# EAGLE board Arduino_Shield (EAGLE 6.5.0)
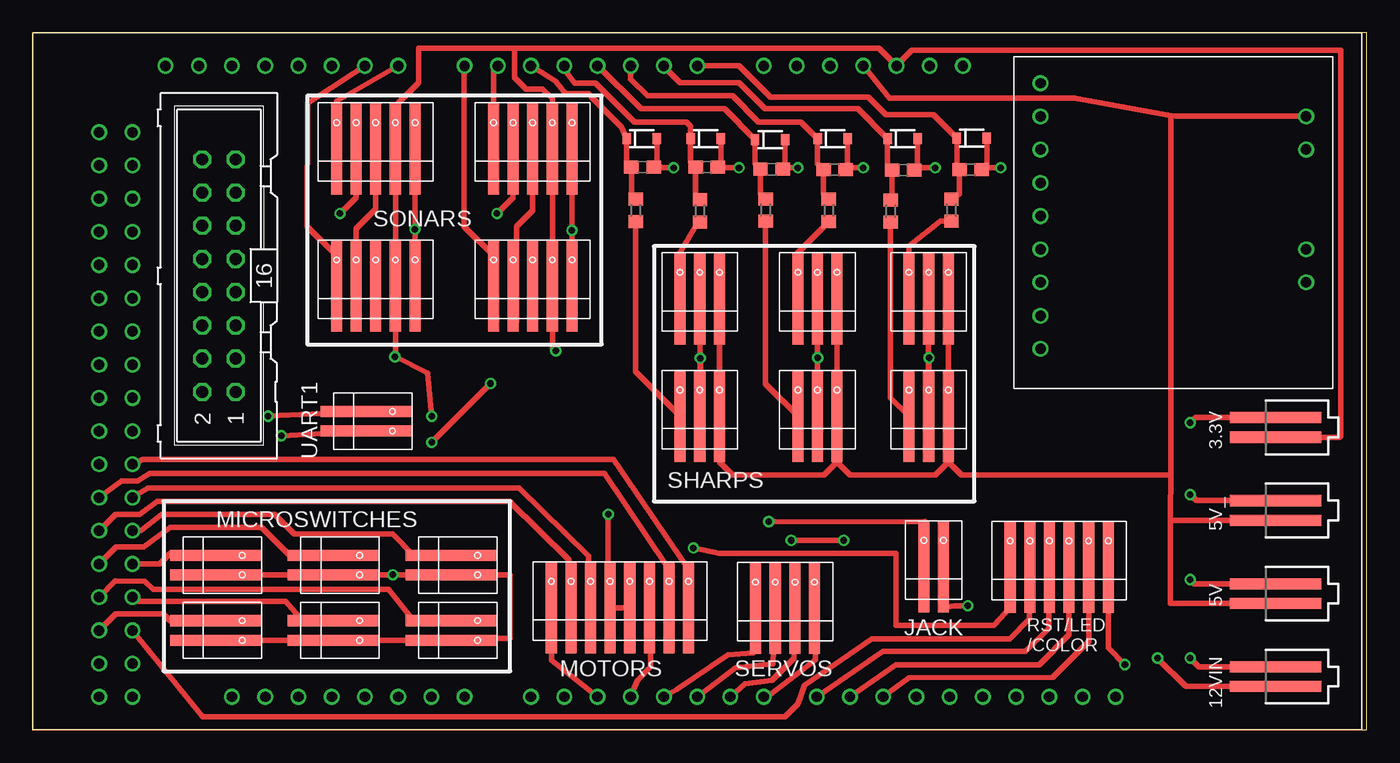
[diagram p0: board, top side]
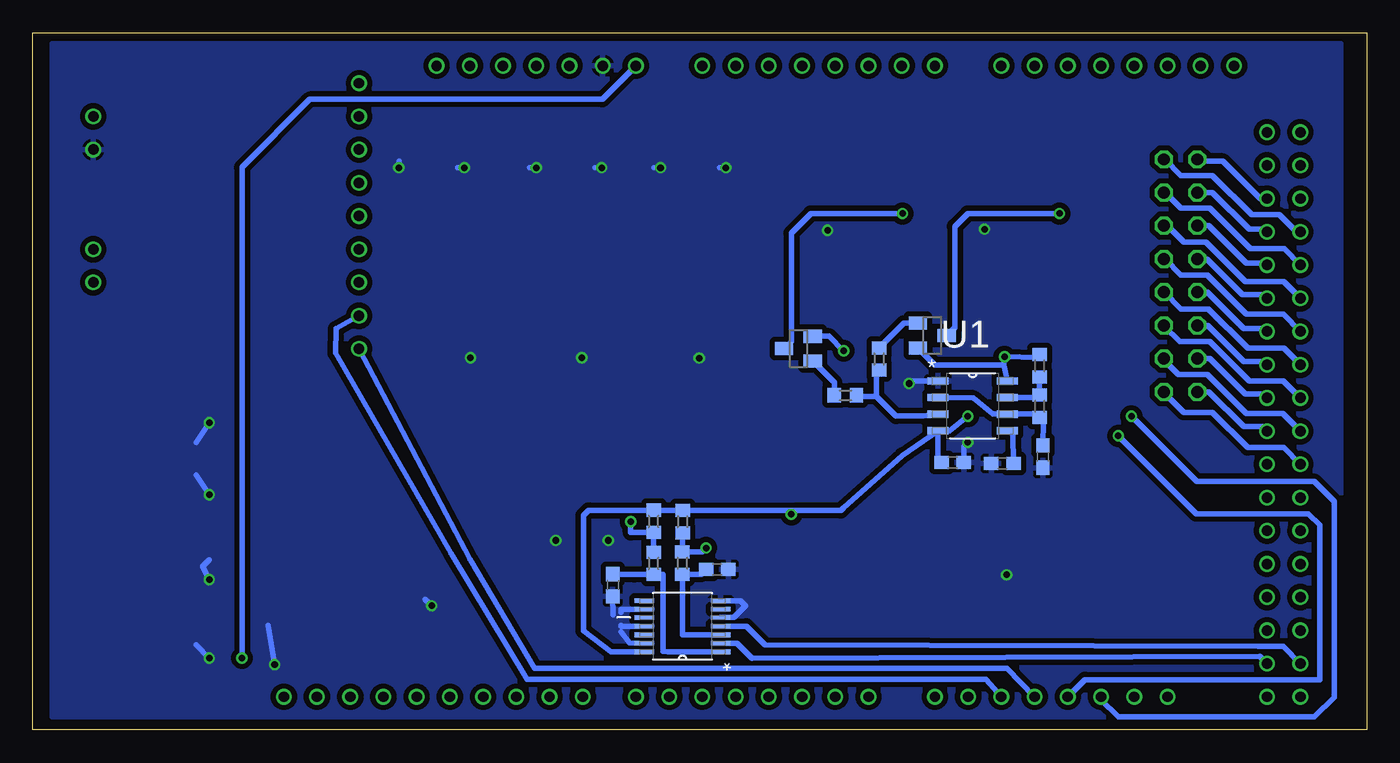
[diagram p1: board, bottom side, seen from below]

Size 102 x 53.33 mm. Coordinates in mm from the lower left corner, seen from the top.
Outline: 0,0 102,0 102,53.33 0,53.33 0,0
Copper layers (1*16): Top 0.0356mm / dielectric 1.5011mm / Bottom 0.0356mm
Design rules "LaenPCBOrder": minimum track width 6mil, minimum drill 13mil, track to track 6mil, track to pad 6mil, pad to pad 6mil, via to via 6mil, smd to smd 6mil, copper to edge 15mil, drill to drill 6mil, minimum pad ring 7mil, minimum via ring 7mil, stop-mask expansion 4mil, vias tented up to drill 0mil, thermal gap 10mil

## Footprints (pad centres in the part's own frame; a part is rotated, then mirrored left to right if it is on the bottom)
87438-02 = smd 7 x 0.85: 1 0,0.75; 2 0,-0.75
C0603 = smd 1.1 x 1: 1 -0.85,0; 2 0.85,0
ML16 = drill 0.914 octagon: 1 -8.89,-1.27; 2 -8.89,1.27; 3 -6.35,-1.27; 4 -6.35,1.27; 5 -3.81,-1.27; 6 -3.81,1.27; 7 -1.27,-1.27; 8 -1.27,1.27; 9 1.27,-1.27; 10 1.27,1.27; 11 3.81,-1.27; 12 3.81,1.27; 13 6.35,-1.27; 14 6.35,1.27; 15 8.89,-1.27; 16 8.89,1.27
87437-0243 = smd 7 x 0.85: P$1 0,0.865; P$2 0,-0.635
87437-0843 = smd 7 x 0.85: P$1 -0.04,5.27; P$2 -0.04,3.77; P$3 -0.04,2.27; P$4 -0.04,0.77; P$5 -0.04,-0.73; P$6 -0.04,-2.23; P$7 -0.04,-3.73; P$8 -0.04,-5.23
SOT23 = smd 1 x 1.4: 1 -0.95,-1.1; 2 0.95,-1.1; 3 0,1.1
R0603 = smd 1 x 1.1: 1 -0.85,0; 2 0.85,0
87437-0643 = smd 7 x 0.85: P$1 -0.04,3.77; P$2 -0.04,2.27; P$3 -0.04,0.77; P$4 -0.04,-0.73; P$5 -0.04,-2.23; P$6 -0.04,-3.73
87437-0443 = smd 7 x 0.85: P$1 0.05,2.25; P$2 0.05,0.75; P$3 0.05,-0.75; P$4 0.05,-2.25
87437-0343 = smd 7 x 0.85: P$1 0,1.5; P$2 0,0; P$3 0,-1.5
87437-0543 = smd 7 x 0.85: P$1 -0.04,2.77; P$2 -0.04,1.27; P$3 -0.04,-0.23; P$4 -0.04,-1.73; P$5 -0.04,-3.23
SOIC127P600X175-8N = smd 1.6 x 0.559: 1 -2.642,1.905; 2 -2.642,0.635; 3 -2.642,-0.635; 4 -2.642,-1.905; 5 2.642,-1.905; 6 2.642,-0.635; 7 2.642,0.635; 8 2.642,1.905
SOP65P640X120-14N = smd 1.473 x 0.356: 1 -2.921,1.956; 2 -2.921,1.295; 3 -2.921,0.66; 4 -2.921,0; 5 -2.921,-0.66; 6 -2.921,-1.295; 7 -2.921,-1.956; 8 2.921,-1.956; 9 2.921,-1.295; 10 2.921,-0.66; 11 2.921,0; 12 2.921,0.66; 13 2.921,1.295; 14 2.921,1.956
ARDUINO-DUE = drill 0.8: 3.3V -17.78,-25.4; 5V 40.64,22.86; 5V2 43.18,22.86; 5V3 -15.24,-25.4; 22 40.64,20.32; 23 43.18,20.32; 24 40.64,17.78; 25 43.18,17.78; 26 40.64,15.24; 27 43.18,15.24; 28 40.64,12.7; 29 43.18,12.7; 30 40.64,10.16; 31 43.18,10.16; 32 40.64,7.62; 33 43.18,7.62; 34 40.64,5.08; 35 43.18,5.08; 36 40.64,2.54; 37 43.18,2.54; 38 40.64,0; 39 43.18,0; 40 40.64,-2.54; 41 43.18,-2.54; 42 40.64,-5.08; 43 43.18,-5.08; 44 40.64,-7.62; 45 43.18,-7.62; 46 40.64,-10.16; 47 43.18,-10.16; 48 40.64,-12.7; 49 43.18,-12.7; 50 40.64,-15.24; 51 43.18,-15.24; 52 40.64,-17.78; 53 43.18,-17.78; A0 -2.54,-25.4; A1 0,-25.4; A2 2.54,-25.4; A3 5.08,-25.4; A4 7.62,-25.4; A5 10.16,-25.4; A6 12.7,-25.4; A7 15.24,-25.4; A8 20.32,-25.4; A9 22.86,-25.4; A10 25.4,-25.4; A11 27.94,-25.4; AREF -29.464,22.86; CANRX 35.56,-25.4; CANTX 38.1,-25.4; DAC0 30.48,-25.4; DAC1 33.02,-25.4; GND -26.924,22.86; GND2 40.64,-20.32; GND3 43.18,-20.32; GND4 -10.16,-25.4; GND5 -12.7,-25.4; IOREF -22.86,-25.4; PWM2 5.08,22.86; PWM3 2.54,22.86; PWM4 0,22.86; PWM5 -2.54,22.86; PWM6 -5.08,22.86; PWM7 -7.62,22.86; PWM8 -11.684,22.86; PWM9 -14.224,22.86; PWM10 -16.764,22.86; PWM11 -19.304,22.86; PWM12 -21.844,22.86; PWM13 -24.384,22.86; RESET -20.32,-25.4; RX0 10.16,22.86; RX1 27.94,22.86; RX2 22.86,22.86; RX3 17.78,22.86; SCL 33.02,22.86; SCL1 -34.544,22.86; SDA 30.48,22.86; SDA1 -32.004,22.86; TX0 7.62,22.86; TX1 25.4,22.86; TX2 20.32,22.86; TX3 15.24,22.86; VIN -7.62,-25.4
SOD-323 = smd 0.63 x 0.83: 1 -1.15,0; 2 1.15,0
UM6 = drill 0.8: P$1 9.652,9.652; P$2 9.652,7.112; P$3 9.652,4.572; P$4 9.652,2.032; P$5 9.652,-0.508; P$6 9.652,-3.048; P$7 9.652,-5.588; P$8 9.652,-8.128; P$9 9.652,-10.668; P$10 -10.668,-8.128; P$11 -10.668,-5.588; P$12 -10.668,2.032; P$13 -10.668,4.572

## Placement (x,y rotation side)
3.3V  87438-02  [87438-02]  95.02,23.14 180 top
5V  87438-02  [87438-02]  95.02,10.44 180 top
5V_  87438-02  [87438-02]  95.02,16.79 180 top
12VIN  87438-02  [87438-02]  95.02,4.09 180 top
C1  0.1uF  [C0603]  71.71,42.87 180 top
C2  0.1uF  [C0603]  27.86,20.4 180 bottom
C3  1uF  [C0603]  24.76,20.91 270 bottom
C4  0.1uF  [C0603]  66.55,42.82 180 top
C5  0.1uF  [C0603]  61.31,42.85 180 top
C6  0.1uF  [C0603]  56.49,42.89 180 top
C7  0.1uF  [C0603]  51.54,43.05 180 top
C8  0.1uF  [C0603]  31.66,20.45 0 bottom
C9  0.1uF  [C0603]  46.62,43.05 180 top
C10  10uF  [C0603]  57.65,11.07 270 bottom
C11  10uF  [C0603]  49.66,12.28 0 bottom
FPGA  [ML16]  14.24,34.75 90 top
JACK  87437-0243  [87437-0243]  69,12.5 90 top
MOTORS  87437-0843  [87437-0843]  44.92,9.4 90 top
Q1  BC857B  [SOT23]  43.46,29.16 90 bottom
Q2  BC857B  [SOT23]  33.22,30.17 270 bottom
R1  10K  [R0603]  46.1,39.74 90 top
R2  10K  [R0603]  51.02,39.7 90 top
R3  10K  [R0603]  56.04,39.76 90 top
R4  10K  [R0603]  60.87,39.74 90 top
R5  10K  [R0603]  65.59,39.69 90 top
R6  10K  [R0603]  70.24,39.77 90 top
R7  10K  [R0603]  54.53,15.96 90 bottom
R8  1K  [R0603]  54.53,12.74 90 bottom
R9  1K  [R0603]  52.33,12.76 90 bottom
R10  10K  [R0603]  52.31,15.94 90 bottom
R11  10K  [R0603]  39.87,25.59 0 bottom
R12  10K  [R0603]  37.29,28.37 270 bottom
RA  330K  [R0603]  25.02,27.86 90 bottom
RB  3.3K  [R0603]  25.01,24.76 90 bottom
RST/LED/COLOR  87437-0643  [87437-0643]  78.5,12.5 90 top
SERVOS  87437-0443  [87437-0443]  57.52,9.26 90 top
SHARP1  87437-0343  [87437-0343]  68.5,33 90 top
SHARP2  87437-0343  [87437-0343]  68.5,24 90 top
SHARP3  87437-0343  [87437-0343]  60,33 90 top
SHARP4  87437-0343  [87437-0343]  60,24 90 top
SHARP5  87437-0343  [87437-0343]  51,33 90 top
SHARP6  87437-0343  [87437-0343]  51,24 90 top
SONAR_BL  87437-0543  [87437-0543]  26,44.5 90 top
SONAR_BR  87437-0543  [87437-0543]  26,34 90 top
SONAR_FL  87437-0543  [87437-0543]  38,44.5 90 top
SONAR_FR  87437-0543  [87437-0543]  38,34 90 top
U1  TLC555  [SOIC127P600X175-8N]  30.14,24.79 0 bottom
U2  SN74HC14PW  [SOP65P640X120-14N]  52.32,7.94 180 bottom
U$1  ARDUINO-DUE  [ARDUINO-DUE]  48.26,25.4 180 top
U$2  ZENER_3.3V  [SOD-323]  71.79,45.28 0 top
U$3  ZENER_3.3V  [SOD-323]  66.51,45.22 0 top
U$4  ZENER_3.3V  [SOD-323]  61.16,45.22 0 top
U$5  ZENER_3.3V  [SOD-323]  56.38,45.15 0 top
U$6  ZENER_3.3V  [SOD-323]  51.46,45.22 0 top
U$7  ZENER_3.3V  [SOD-323]  46.57,45.22 0 top
UART1  87437-0243  [87437-0243]  25.5,23.5 0 top
UM6  UM6  [UM6]  86.7,38.8 180 top
USW1  87437-0243  [87437-0243]  14,7.5 0 top
USW2  87437-0243  [87437-0243]  23,7.5 0 top
USW3  87437-0243  [87437-0243]  32,7.5 0 top
USW4  87437-0243  [87437-0243]  14,12.5 0 top
USW5  87437-0243  [87437-0243]  23,12.5 0 top
USW6  87437-0243  [87437-0243]  32,12.5 0 top

## Library data of the parts
3.3V 5V 5V_ 12VIN = con-molex; OC_FARNELL: 1711327; OC_NEWARK: unknown
C1-C11 R1-R12 RA RB = rcl
FPGA = con-harting-ml; OC_FARNELL: unknown; OC_NEWARK: unknown
JACK MOTORS RST/LED/COLOR SERVOS SHARP1-SHARP6 SONAR_BL SONAR_BR SONAR_FL SONAR_FR U$1 UART1 UM6 USW1-USW6 = custom
Q1 Q2 = transistor-pnp
U1 = custom; MPN: LM555CM; OC_FARNELL: 9488227; OC_NEWARK: 78K6011; PACKAGE: SOIC-8; SUPPLIER: LM555CM
U2 = custom; MPN: SN74HC14PW; OC_FARNELL: 9591133; OC_NEWARK: 02H5414; PACKAGE: TSSOP-14; SUPPLIER: Texas Instruments
U$2-U$7 = SparkFun

## Nets
3.3VCC: 3.3V.1 C8.1 MOTORS.P$4 MOTORS.P$5 Q1.2 Q2.2 R7.2 R10.2 RA.2 SONAR_BL.P$4 SONAR_BR.P$4 SONAR_FL.P$4 SONAR_FR.P$4 U1.4 U1.8 U2.14 U$1.3.3V
5VCC: 5V.1 5V_.1 SHARP1.P$3 SHARP2.P$3 SHARP3.P$3 SHARP4.P$3 SHARP5.P$3 SHARP6.P$3 U$1.5V3 UM6.P$10
12VIN: 12VIN.1 U$1.VIN
COLOR: RST/LED/COLOR.P$2 U$1.24
GND: 3.3V.2 5V.2 5V_.2 12VIN.2 C1.1 C2.2 C3.2 C4.1 C5.1 C6.1 C7.1 C8.2 C9.1 C10.2 C11.2 JACK.P$2 RST/LED/COLOR.P$6 SHARP1.P$2 SHARP2.P$2 SHARP3.P$2 SHARP4.P$2 SHARP5.P$2 SHARP6.P$2 SONAR_BL.P$5 SONAR_BR.P$5 SONAR_FL.P$5 SONAR_FR.P$5 U1.1 U2.5 U2.7 U2.9 U2.11 U2.13 U$1.GND4 U$2.2 U$3.2 U$4.2 U$5.2 U$6.2 U$7.2 UM6.P$11 USW1.P$2 USW2.P$2 USW3.P$2 USW4.P$2 USW5.P$2 USW6.P$2
MOTOR1_BREAK: MOTORS.P$3 U$1.32
MOTOR1_DIR: MOTORS.P$2 U$1.31
MOTOR1_PWM: MOTORS.P$1 U$1.PWM2
MOTOR2_BREAK: MOTORS.P$8 U$1.34
MOTOR2_DIR: MOTORS.P$7 U$1.33
MOTOR2_PWM: MOTORS.P$6 U$1.PWM3
N$2: RST/LED/COLOR.P$3 U$1.PWM8
N$3: SERVOS.P$1 U$1.PWM4
N$4: SERVOS.P$2 U$1.PWM5
N$5: SERVOS.P$3 U$1.PWM6
N$6: SERVOS.P$4 U$1.PWM7
N$9: U$1.TX1 UART1.P$2
N$10: U$1.RX1 UART1.P$1
N$11: U2.2 U$1.22
N$12: RST/LED/COLOR.P$4 U$1.PWM9
N$13: RST/LED/COLOR.P$5 U$1.PWM10
N$14: U2.4 U$1.23
N$27: JACK.P$1 R7.1 R8.2
N$33: C3.1 RB.1 U1.2 U1.6
N$34: C2.1 U1.5
N$35: RA.1 RB.2 U1.7
N$36: R11.2 R12.2 U1.3
N$37: Q2.1 R12.1
N$38: Q1.1 R11.1
N$39: SONAR_FL.P$3 SONAR_FR.P$2
N$40: SONAR_BL.P$3 SONAR_BR.P$2
N$44: FPGA.1 U$1.35
N$45: Q1.3 SONAR_FL.P$2
N$46: Q2.3 SONAR_BL.P$2
N$47: FPGA.2 U$1.36
N$48: FPGA.3 U$1.37
N$49: FPGA.4 U$1.38
N$50: FPGA.5 U$1.39
N$51: FPGA.6 U$1.40
N$52: FPGA.7 U$1.41
N$53: FPGA.8 U$1.42
N$54: FPGA.9 U$1.43
N$55: FPGA.10 U$1.44
N$56: FPGA.11 U$1.45
N$57: FPGA.12 U$1.46
N$58: FPGA.13 U$1.47
N$59: FPGA.14 U$1.48
N$60: FPGA.15 U$1.49
N$61: FPGA.16 U$1.50
N$62: R5.1 SHARP2.P$1
N$63: R4.1 SHARP3.P$1
N$64: R3.1 SHARP4.P$1
N$65: R2.1 SHARP5.P$1
N$66: R1.1 SHARP6.P$1
N$67: C10.1 R8.1 U2.1
N$69: R6.1 SHARP1.P$1
N$71: C11.1 R9.1 U2.3
RST: R9.2 R10.1 RST/LED/COLOR.P$1
SHARP1: C1.2 R6.2 U$1.A0 U$2.1
SHARP2: C4.2 R5.2 U$1.A1 U$3.1
SHARP3: C5.2 R4.2 U$1.A2 U$4.1
SHARP4: C6.2 R3.2 U$1.A3 U$5.1
SHARP5: C7.2 R2.2 U$1.A4 U$6.1
SHARP6: C9.2 R1.2 U$1.A5 U$7.1
SONAR_BL: SONAR_BL.P$1 U$1.A8
SONAR_BR: SONAR_BR.P$1 U$1.A9
SONAR_FL: SONAR_FL.P$1 U$1.A6
SONAR_FR: SONAR_FR.P$1 U$1.A7
UM6_RX: U$1.TX2 UM6.P$2
UM6_TX: U$1.RX2 UM6.P$1
USW1: U$1.25 USW1.P$1
USW2: U$1.26 USW2.P$1
USW3: U$1.27 USW3.P$1
USW4: U$1.28 USW4.P$1
USW5: U$1.29 USW5.P$1
USW6: U$1.30 USW6.P$1

## Tracks (layer width: path | path; a pad name or v marks a point on that pad's centre or on a via)
3.3VCC  (via drill 0.5)
  Top 0.406: 3.3V.1 99.89,22.39 100,22.5 100,52 67.24,52 U$1.3.3V 64.71,52.13 37.6,52.13 36.92,52.13 | MOTORS.P$5 MOTORS.P$4 44,9.19 v44,16.5 | 36.92,52.13 36.84,52.02 36.84,49.88 37.71,49 39,49 39.73,48.27 SONAR_FL.P$4 SONAR_FR.P$4 39.73,29.27 v40,29 | 36.92,52.13 29.49,52.13 29.5,51.5 29.5,49.5 27.73,47.73 SONAR_BL.P$4 SONAR_BR.P$4 27.73,28.77 v27.7,28.55 30.2,27.3 v30.5,24
  Bottom 0.406: U2.14 57.78,5.98 59.9,7.6 59.9,16.4 59.5,16.8 R7.2 54.51,16.79 R10.2 43.71,16.79 | U1.4 35.52,21 40,17 40.21,16.79 43.71,16.79 | U1.4 32.79,20.83 C8.1 | RA.2 25.23,28.5 v27.7,28.55 27.73,27.91 | U1.8 27.73,27.91 | 27.73,27.91 33.02,27.92 Q2.2 | v40,29 41.11,30.11 Q1.2 | U1.4 31.93,22.89 v30.5,24 | 43.71,16.79 v44,16.5
5VCC
  Top 0.406: 95.06,16 5V_.1 86.96,16.04 86.97,16.49 | SHARP5.P$3 SHARP6.P$3 52.5,20.5 53.5,19.5 60.5,19.5 61.5,20.5 | SHARP3.P$3 SHARP4.P$3 61.5,20.5 | SHARP1.P$3 SHARP2.P$3 70,20.5 | 70,20.5 69,19.5 62.5,19.5 61.5,20.5 | 70,20.5 71,19.5 87,19.5 | 87,19.5 86.97,16.49 | U$1.5V3 65.51,48.31 79.69,48.31 87,47 | 87,47 87,19.5 | UM6.P$10 87.43,46.93 87,47 | 5V.1 86.97,9.69 86.97,16.49
12VIN  (via drill 0.5)
  Top 0.406: v86,5.5 88.16,3.34 12VIN.1
  Bottom 0.406: U$1.VIN 58.45,48.23 80.82,48.23 86,43.05 v86,5.5
COLOR
  Top 0.406: U$1.24 13,1 57.5,1 58.5,2 59,3.43 64.18,6.98 74.7,6.98 76.19,8.5 RST/LED/COLOR.P$2
GND  (via drill 0.5)
  Top 0.406: USW1.P$2 14,7 14.13,6.87 USW2.P$2 USW3.P$2 32,7 36.5,7 36.5,11.87 USW6.P$2 v27.53,11.87 | USW4.P$2 14,12 14.13,11.87 USW5.P$2 v27.53,11.87 | SONAR_BR.P$5 SONAR_BL.P$5 | SONAR_FL.P$5 SONAR_FR.P$5 v41.23,38.21 | C9.1 47.72,43.3 | 47.72,43.3 U$7.2 | C7.1 52.61,43.27 | 52.61,43.27 U$6.2 | C6.1 57.53,43.07 | 57.53,43.07 U$5.2 | C5.1 62.31,43 | 62.31,43 U$4.2 | C4.1 67.66,43.08 | 67.66,43.08 U$3.2 | U$2.2 72.94,43.26 C1.1 72.69,43 v74,43 | SHARP5.P$2 SHARP6.P$2 51.04,26.04 v51.04,28.44 | SHARP3.P$2 SHARP4.P$2 60.02,23.02 v60.02,28.47 | SHARP1.P$2 SHARP2.P$2 68.52,23.02 v68.52,28.47 | v27.53,11.87 | SONAR_BR.P$5 | SONAR_BR.P$5 v29.23,38.3 | 47.72,43.3 48.02,43 v49,43 | 52.61,43.27 52.88,43 v54,43 | 57.53,43.07 57.6,43 v58.5,43 | 62.31,43 v63.5,43 | 67.66,43.08 67.74,43 v69,43 | 5V.2 88.81,11.19 v88.5,11.5 | 12VIN.2 89.16,4.84 v88.5,5.5 | 5V_.2 88.96,17.54 v88.5,18 | 3.3V.2 88.89,23.89 v88.5,23.5 | RST/LED/COLOR.P$6 82.23,6.27 v83.5,5 | JACK.P$2 69.64,9.37 70.5,9.5 v71.5,9.5 | v30.5,22 v35,26.5 | v58,14.5 v62,14.5
  Bottom 0.406: v49,43 49.5,43 | v54,43 54.5,43 | v58.5,43 59,43 | v63.5,43 64,43 | v69,43 69.5,43 | v74,43 74,43.5 | v88.5,11.5 89,12.5 88.5,13 | v88.5,5.5 89.5,6.5 | v88.5,18 89.5,19.5 | v88.5,23.5 89.5,22 | v83.5,5 84,8 | v71.5,9.5 72,10 | C8.2 30.81,21.69 v30.5,22 | v35,26.5 34.8,26.7 U1.1 | C10.2 57.63,8.81 | U2.5 48.4,8.6 47.5,9.5 47.9,9.9 U2.7 | U2.9 57,9.23 57,9 | U2.13 55,6.64 56.38,6.65 57,7.5 | U2.11 57,7.94 57,8
  pour Bottom (isolate 0.406): 2,52.5 2,1 100.5,1 100.5,52.5
MOTOR1_BREAK
  Top 0.406: U$1.32 8.84,18.5 37.2,18.5 42.51,13.31 MOTORS.P$3
MOTOR1_DIR
  Top 0.406: U$1.31 6.34,16.5 8.17,16.5 9.5,17.5 36.47,17.5 41,13 MOTORS.P$2
MOTOR1_PWM
  Top 0.406: U$1.PWM2 39.68,5.33 MOTORS.P$1
MOTOR2_BREAK
  Top 0.406: U$1.34 8.4,20.69 31.58,20.69 44.42,20.71 50,12.5 MOTORS.P$8
MOTOR2_DIR
  Top 0.406: U$1.33 6.81,19.04 8.01,19.04 8.95,19.63 32.06,19.63 43.73,19.64 48.5,12.5 MOTORS.P$7
MOTOR2_PWM
  Top 0.406: U$1.PWM3 46.23,3.79 47.22,4.83 MOTORS.P$6
N$2
  Top 0.406: RST/LED/COLOR.P$3 77.67,7.77 75.9,6 65,6 U$1.PWM8
N$3
  Top 0.406: U$1.PWM4 49.26,3.12 53.17,5.74 55.1,5.88 SERVOS.P$1
N$4
  Top 0.406: U$1.PWM5 50.83,2.55 53.75,4.75 56.6,5.05 SERVOS.P$2
N$5
  Top 0.406: U$1.PWM6 54.45,3.52 56.51,3.82 58.2,5.5 SERVOS.P$3
N$6
  Top 0.406: SERVOS.P$4 59.85,5.35 55.88,2.32 U$1.PWM7
N$9  (via drill 0.5)
  Top 0.406: UART1.P$2 v19,22.5
  Bottom 0.406: U$1.TX1 21.55,3.85 3.61,3.85 3.61,15.68 4.48,16.54 13.04,16.54 v19,22.5
N$10  (via drill 0.5)
  Top 0.406: UART1.P$1 v18,24
  Bottom 0.406: U$1.RX1 20.32,2.32 19,1 4,1 2.5,2.5 2.5,17.5 4,19 13,19 v18,24
N$11
  Bottom 0.406: U2.2 48.15,6.64 47,5.5 8.19,5.64 U$1.22
N$12
  Top 0.406: RST/LED/COLOR.P$4 79.21,7.27 76.97,5 66,5 U$1.PWM9
N$13
  Top 0.406: RST/LED/COLOR.P$5 80.75,6.77 78.01,4.02 67,4 U$1.PWM10
N$14
  Bottom 0.406: U2.4 47.44,7.94 46,6.5 8.3,6.4 6.4,6.4 U$1.23
N$27  (via drill 0.5)
  Top 0.406: v56.27,15.93 68.23,15.94 JACK.P$1
  Bottom 0.406: 54.62,13.5 R8.2 R7.1 56.28,15.11 v56.27,15.93
N$33
  Bottom 0.406: U1.2 30.09,25.38 28.59,24.18 U1.6 25.32,24.16 RB.1 24.74,23.59 C3.1
N$34
  Bottom 0.406: U1.5 27.05,22.66 C2.1
N$35
  Bottom 0.406: U1.7 25.16,25.42 RB.2 25.06,26.97 RA.1
N$36
  Bottom 0.406: U1.3 33.94,24 36,24 37.5,25.5 | 37.5,25.5 37.5,27.31 R12.2 | 37.5,25.5 38.93,25.5 R11.2
N$37
  Bottom 0.406: R12.1 35.39,31.12 Q2.1
N$38
  Bottom 0.406: R11.1 40.72,26.58 Q1.1
N$39
  Top 0.406: SONAR_FL.P$3 38.23,39.73 37,38.5 37,31.23 SONAR_FR.P$2
N$40
  Top 0.406: SONAR_BL.P$3 26.22,39.84 24.73,38.34 24.73,35.73 SONAR_BR.P$2
N$44
  Bottom 0.406: U$1.35 6.36,21.6 9.1,21.6 11.8,24.3 14,24.3 15.51,25.81 FPGA.1
N$45  (via drill 0.5)
  Top 0.406: SONAR_FL.P$2 36.73,40.73 v35.5,39.5
  Bottom 0.406: v35.5,39.5 42.5,39.5 44,38 44,29.72 Q1.3
N$46  (via drill 0.5)
  Top 0.406: SONAR_BL.P$2 24.73,40.73 v23.5,39.5
  Bottom 0.406: v23.5,39.5 30.5,39.5 31.5,38.5 31.5,30.79 Q2.3
N$47
  Bottom 0.406: U$1.36 7.96,23.2 9.4,23.2 12.06,25.86 FPGA.2
N$48
  Bottom 0.406: U$1.37 6.42,24.2 9.2,24.2 12.2,27.2 14.4,27.2 15.51,28.31 FPGA.3
N$49
  Bottom 0.406: U$1.38 7.92,25.7 9.3,25.7 12,28.4 FPGA.4
N$50
  Bottom 0.406: U$1.39 6.38,26.7 9,26.7 12,29.7 14.3,29.7 15.51,30.91 FPGA.5
N$51
  Bottom 0.406: U$1.40 7.88,28.2 9.4,28.2 12.14,30.94 FPGA.6
N$52
  Bottom 0.406: U$1.41 6.34,29.2 9.1,29.2 12.1,32.2 14.2,32.2 15.48,33.48 FPGA.7
N$53
  Bottom 0.406: U$1.42 7.84,30.7 9.4,30.7 12.18,33.48 FPGA.8
N$54
  Bottom 0.406: U$1.43 6.4,31.8 9.2,31.8 12.2,34.8 14.2,34.8 15.42,36.02 FPGA.9
N$55
  Bottom 0.406: U$1.44 7.9,33.3 9.5,33.3 12.22,36.02 FPGA.10
N$56
  Bottom 0.406: U$1.45 6.36,34.3 9.3,34.3 12.3,37.3 14,37.3 15.26,38.56 FPGA.11
N$57
  Bottom 0.406: U$1.46 7.76,35.7 9.2,35.7 12.06,38.56 FPGA.12
N$58
  Bottom 0.406: U$1.47 6.32,36.8 8.9,36.8 12,39.9 14.2,39.9 15.4,41.1 FPGA.13
N$59
  Bottom 0.406: U$1.48 7.82,38.3 9,38.3 11.8,41.1 FPGA.14
N$60
  Bottom 0.406: U$1.49 5.4,38.1 6.7,39.4 8.8,39.4 11.8,42.4 14.2,42.4 15.44,43.64 FPGA.15
N$61
  Bottom 0.406: U$1.50 8.14,40.64 11,43.5 12.83,43.5 FPGA.16
N$62
  Top 0.406: R5.1 65.59,25.41 SHARP2.P$1
N$63
  Top 0.406: R4.1 60.87,38.87 58.5,36.5 SHARP3.P$1
N$64
  Top 0.406: R3.1 56.04,26.46 SHARP4.P$1
N$65
  Top 0.406: R2.1 50.85,38.85 49.5,36.5 SHARP5.P$1
N$66
  Top 0.406: R1.1 46.1,27.4 SHARP6.P$1
N$67
  Bottom 0.406: U2.1 53.43,5.98 53.8,6 53.8,11.89 R8.1 56.02,11.89 C10.1
N$69
  Top 0.406: R6.1 69.42,38.92 67,37 SHARP1.P$1
N$71
  Bottom 0.406: U2.3 52.33,7.28 R9.1 50.88,11.91 C11.1
RST  (via drill 0.5)
  Top 0.406: v50.51,13.92 52.5,13.5 66,13.5 66,8 73.5,8 74.77,9.42 RST/LED/COLOR.P$1
  Bottom 0.406: R10.1 52.33,15.07 R9.2 50.82,13.61 v50.51,13.92
SHARP1
  Top 0.406: U$1.A0 54.01,50.8 56.42,48.38 63.91,48.38 65.24,47.05 68.86,47.05 U$2.1 70.64,43.09 C1.2 70.86,41 R6.2
SHARP2
  Top 0.406: U$1.A1 48.26,50.74 49.5,49.5 54,49.5 56,47.5 63.08,47.5 U$3.1 65.36,43.17 C4.2 65.7,40.93 R5.2
SHARP3
  Top 0.406: U$1.A2 45.72,49.78 47,48.5 53.5,48.5 55.5,46.5 58.73,46.5 U$4.1 60.01,43.3 C5.2 60.46,41 R4.2
SHARP4
  Top 0.406: U$1.A3 43.2,50.8 46.5,47.5 52.88,47.5 U$5.1 55.23,43.3 C6.2 55.65,41 R3.2
SHARP5
  Top 0.406: U$1.A4 40.68,50.51 41.44,49.47 43.03,49.46 46,46.5 50,46.5 50.31,46.19 U$6.1 50.31,43.43 C7.2 50.69,40.88 R2.2
SHARP6
  Top 0.406: U$1.A5 39.96,49.6 40.74,48.65 42.5,48.65 42.74,48.41 45.03,46.11 U$7.1 45.42,43.4 C9.2 45.77,40.92 R1.2
SONAR_BL
  Top 0.406: U$1.A8 23.23,48.09 SONAR_BL.P$1
SONAR_BR
  Top 0.406: SONAR_BR.P$1 23.23,36.27 21,38.5 21.01,47.93 U$1.A9
SONAR_FL
  Top 0.406: U$1.A6 35.23,50.47 SONAR_FL.P$1
SONAR_FR
  Top 0.406: U$1.A7 33,50.78 33,38.5 35.23,36.27 SONAR_FR.P$1
UM6_RX
  Bottom 0.406: U$1.TX2 29.11,3.9 64.21,3.9 70,13.5 78.84,28.82 78.81,30.69 UM6.P$2
UM6_TX
  Bottom 0.406: UM6.P$1 68.55,13.05 63.64,4.72 27.5,4.72 U$1.RX2
USW1
  Top 0.406: U$1.25 6.36,8.9 9.97,8.9 10.51,8.37 USW1.P$1
USW2
  Top 0.406: U$1.26 8.12,9.83 19.34,9.83 20.64,8.37 USW2.P$1
USW3
  Top 0.406: U$1.27 6.32,11.4 8.58,11.38 9.22,10.75 27.19,10.75 29,8.5 USW3.P$1
USW4
  Top 0.406: U$1.28 9.7,12.7 10.5,13.5 11,13.5 | 11.42,13.5 11,13.5 | 11,13.5 11.13,13.37 USW4.P$1
USW5
  Top 0.406: U$1.29 6.38,14 8.5,14 10.5,15.5 17.5,15.5 19.64,13.37 USW5.P$1
USW6
  Top 0.406: U$1.30 8.29,15.26 9.88,16.5 18.5,16.5 20,15 27.5,15 29.14,13.37 USW6.P$1

## Text on the board
tNames: SONARS | SHARPS | MICROSWITCHES | RST/LED / /COLOR